# Altium PCB Digital_Watch.PcbDoc (part 1 of 2)
Units mm, origin at the board's own origin, x right, y up, seen from the top; angles counter-clockwise.
Board outline 70.45 x 70.45 mm, 4 copper layers (Top Layer, Mid Layer 1, Mid Layer 2, Bottom Layer), stack 1.583 mm thick; 72 components, 93 nets, 389 pads, 114 vias.
Unrouted connection lines stored in the file: 91.
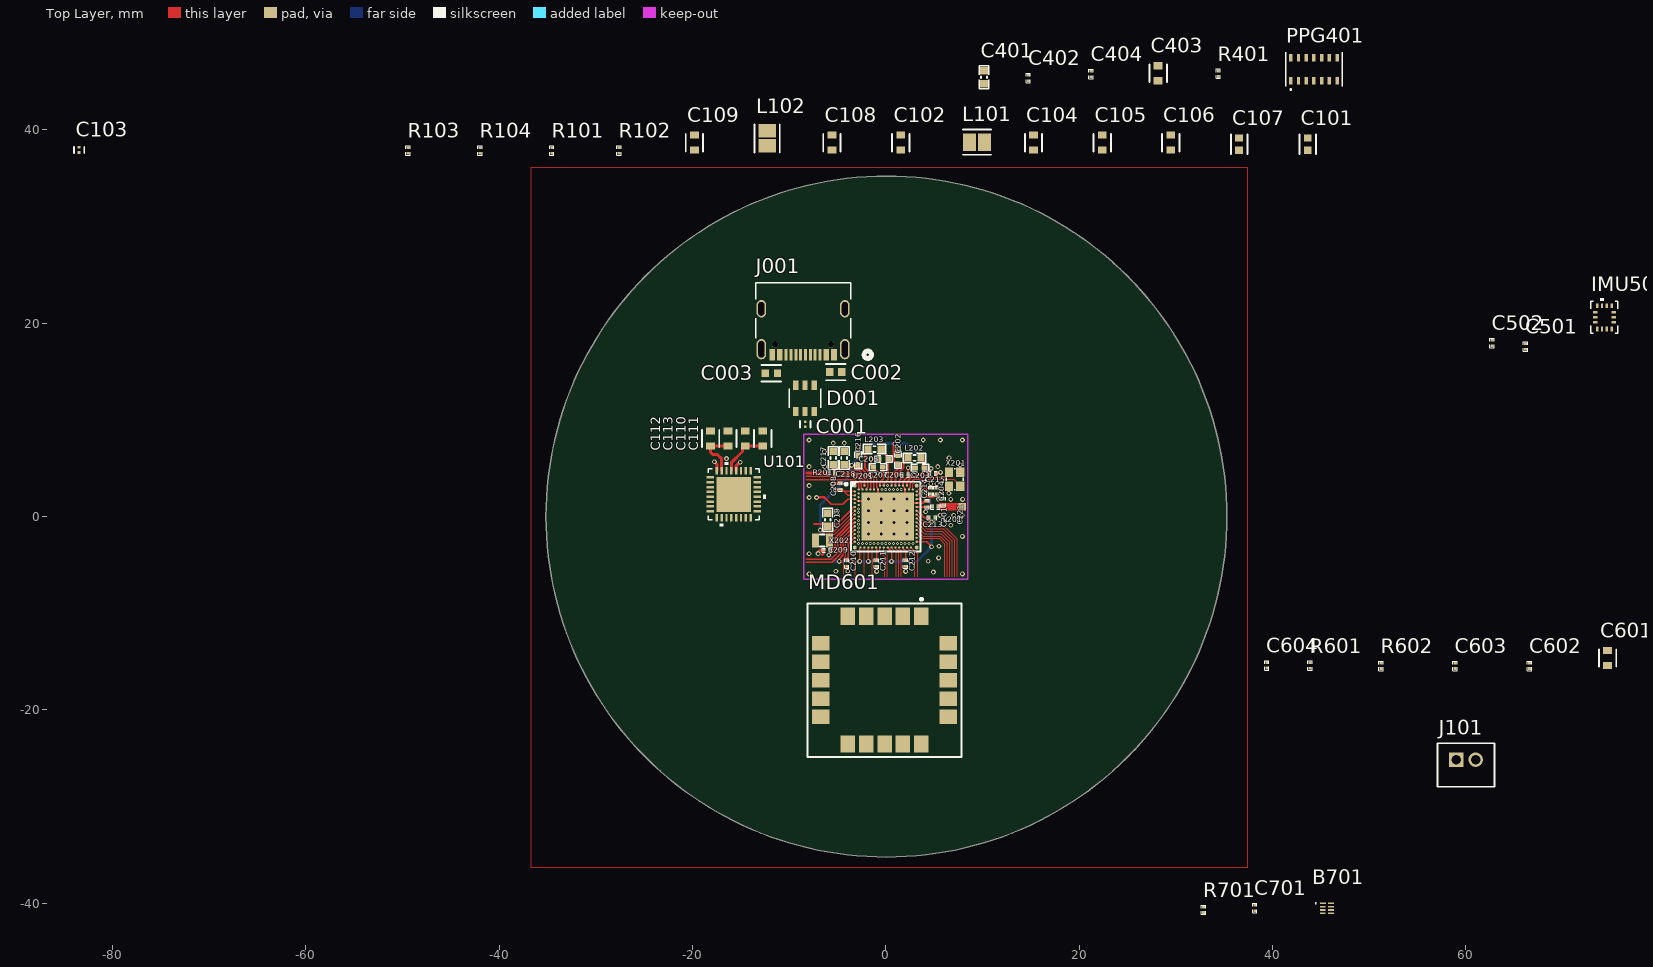
[diagram p0: Top Layer view]
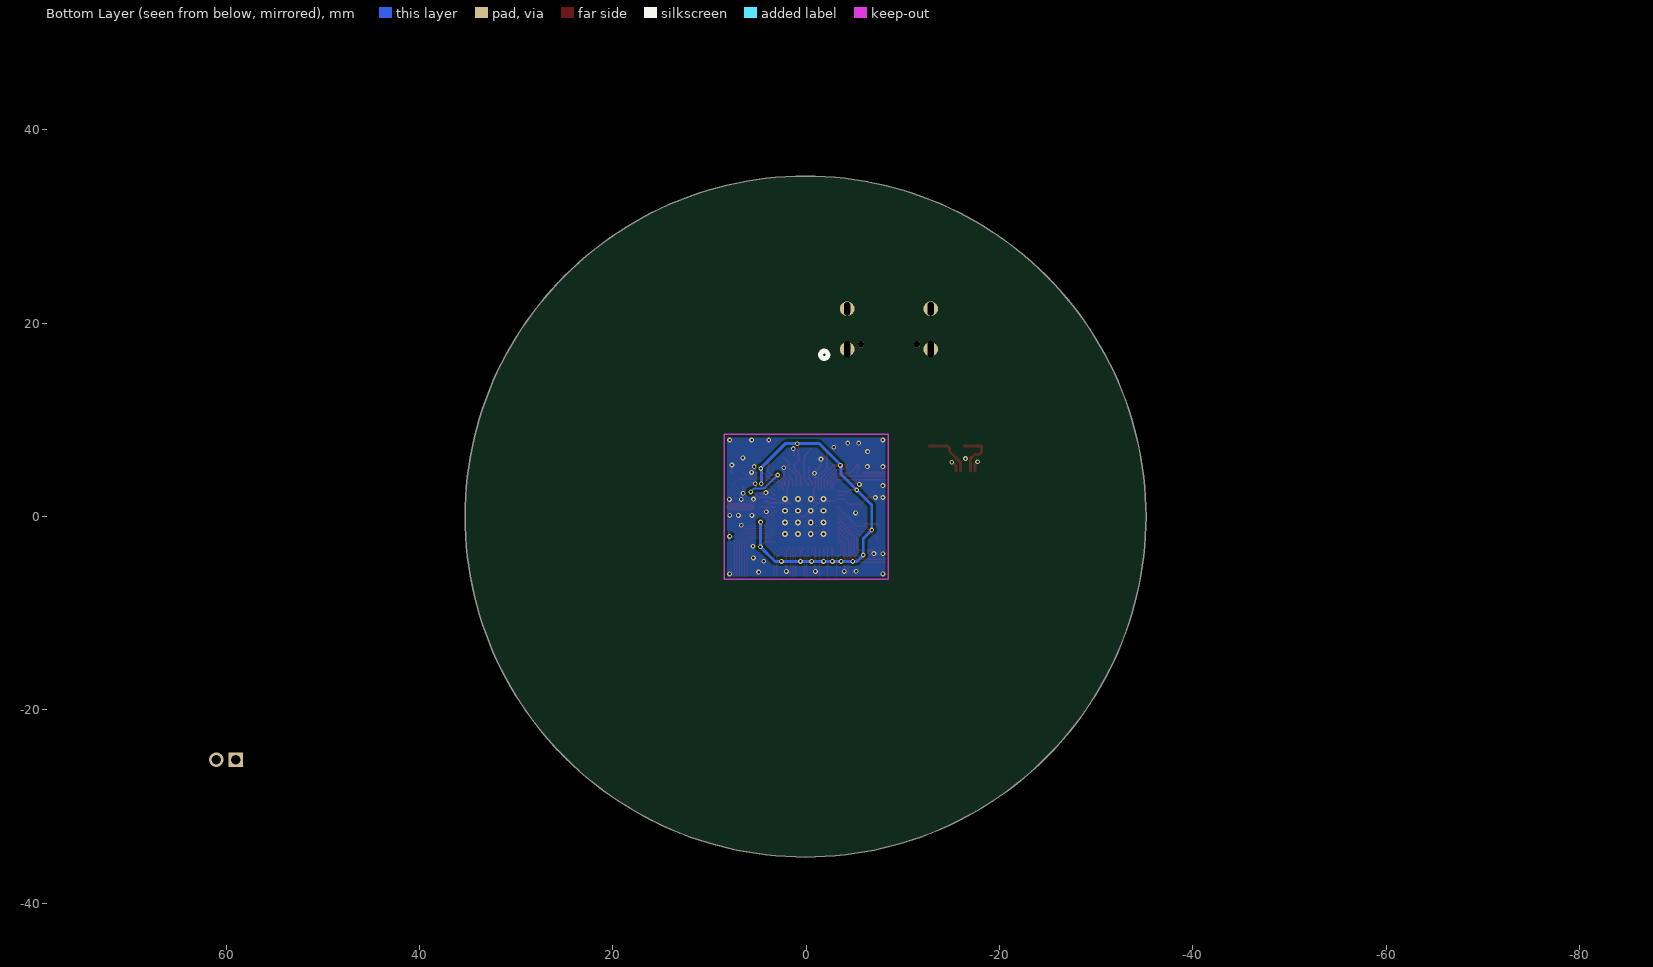
[diagram p1: Bottom Layer view, seen from below]
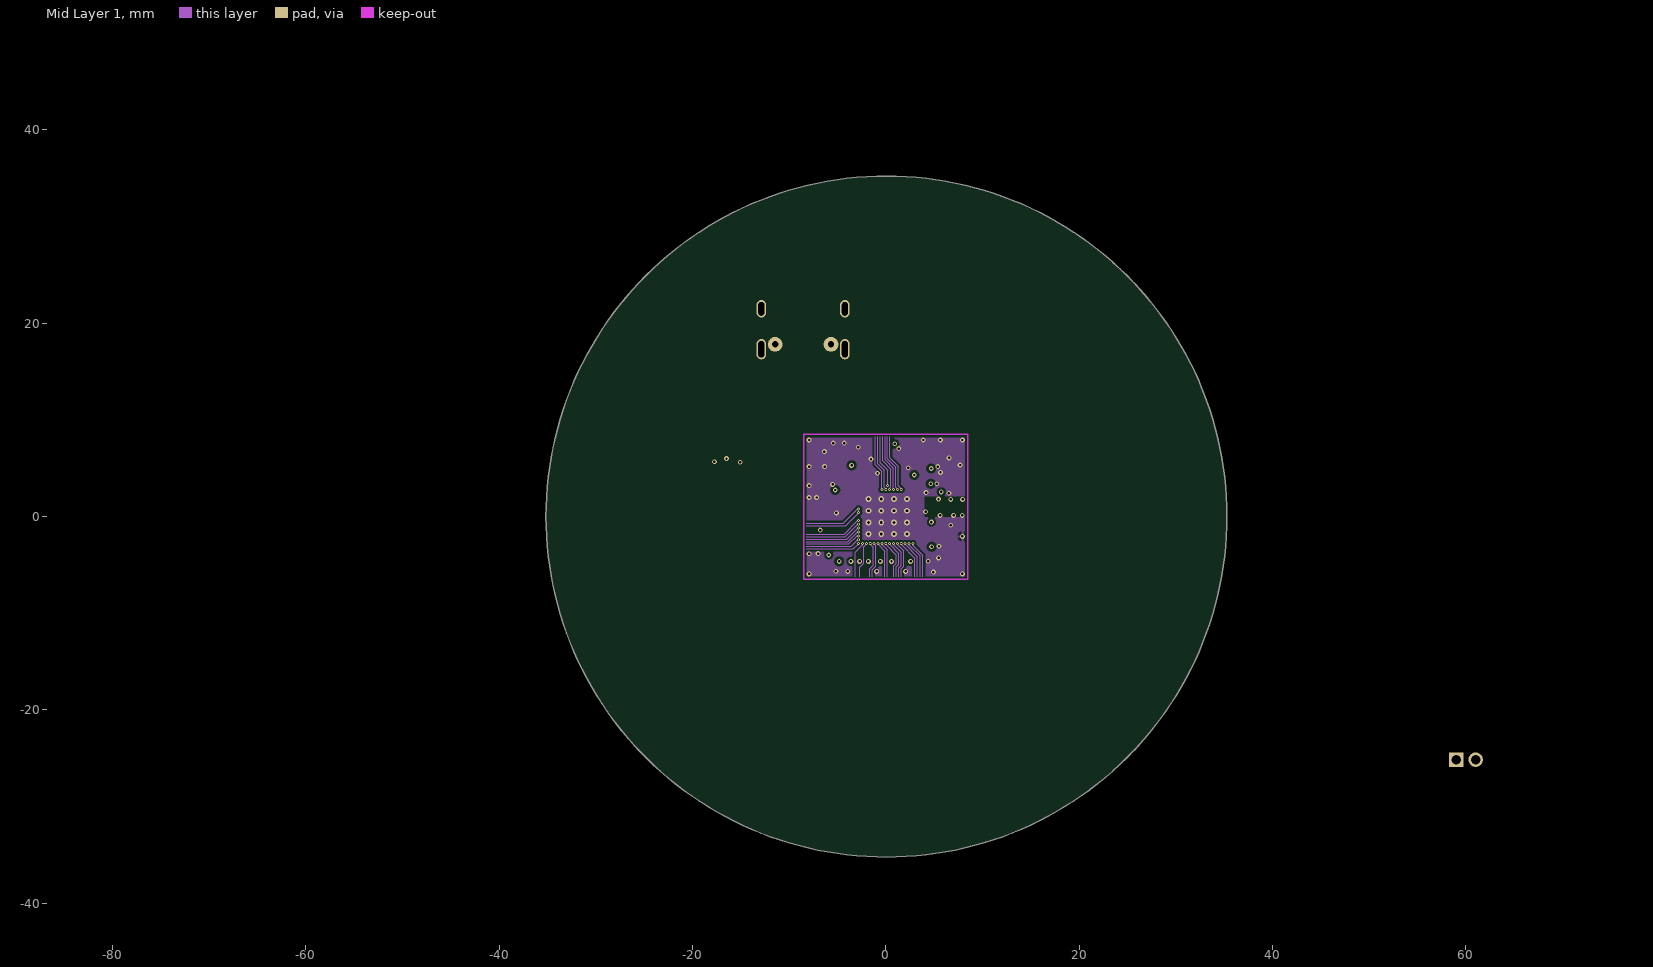
[diagram p2: Mid Layer 1]
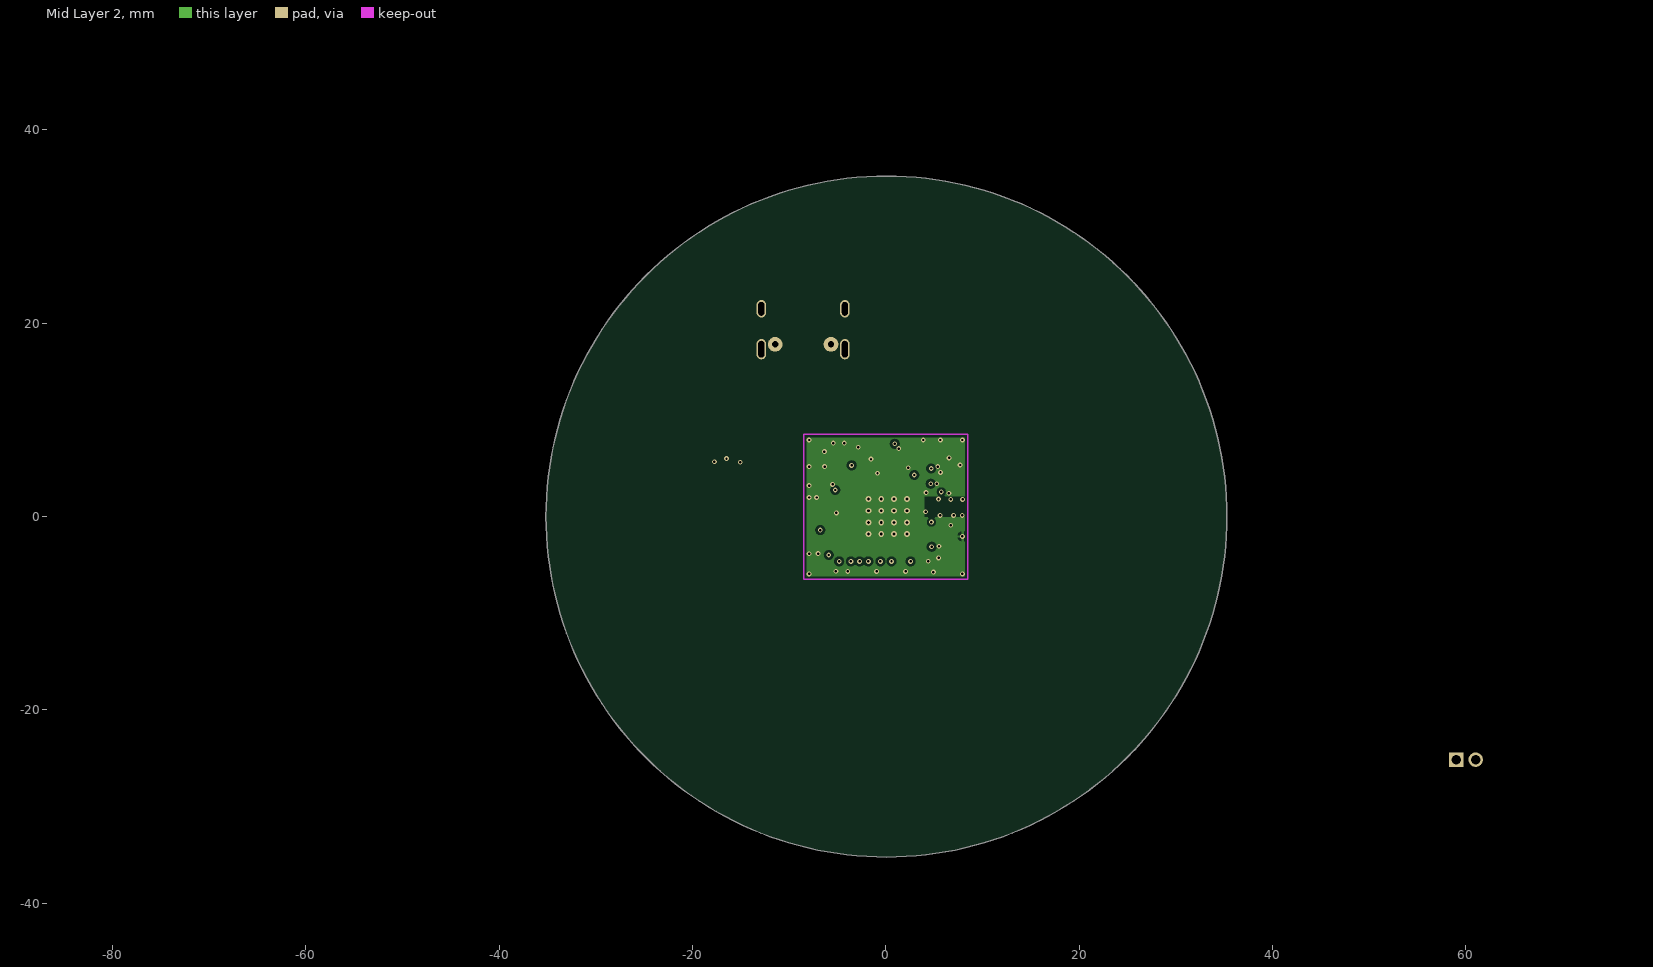
[diagram p3: Mid Layer 2]

## Layer stack, top to bottom
Top Solder: solder mask 0.0102, Solder Resist, Dk 3.5
Top Layer: signal copper 0.0356
Dielectric1: core 0.07, FR-4, Dk 4.8
Mid Layer 1: signal copper 0.036
Dielectric 3: prepreg 1.3, Dk 4.2
Mid Layer 2: signal copper 0.036
Dielectric 2: core 0.07, Dk 4.2
Bottom Layer: signal copper 0.0356
Bottom Solder: solder mask 0.0102, Solder Resist, Dk 3.5

## Board outline
0.075,-35.225 cw(c0.075,0) -35.15,0 cw(c0.075,0) 0.075,35.225 cw(c0.075,0) 35.3,0 cw(c0.075,0)

## Design rules (kind name [scope] priority, off if disabled: settings)
Clearance Clearance_microvia [AsMM(ViaDiameter) = 0.3 vs AsMM(ViaDiameter) = 0.3] p1: gap=0.1 ignorepadtopadclearanceinfootprint=FALSE
Clearance Polygon_ANT [(InNamedPolygon('Top_Layer-GND')) or  (InNamedPolygon('Mid_Layer_1-GND')) or (InNamedPolygon('Mid_Layer_2-GND')) or (InNamedPolygon('Bottom_Layer-GND')) vs InNet('RF')] p2: gap=0.127 ignorepadtopadclearanceinfootprint=FALSE except(0: Arc-Hole Track-Hole SMDPad-Hole THPad-Hole Via-Hole Fill-Hole Poly-Hole Region-Hole Text-Hole)
Clearance Polygon [(InNamedPolygon('Top_Layer-GND')) or  (InNamedPolygon('Mid_Layer_1-GND')) or (InNamedPolygon('Mid_Layer_2-GND')) or (InNamedPolygon('Bottom_Layer-GND'))] p3: gap=0.25 ignorepadtopadclearanceinfootprint=FALSE
Clearance Clearance_Top [OnTopLayer] p4: gap=0.125 ignorepadtopadclearanceinfootprint=FALSE
Clearance [All] p5: gap=0.125 ignorepadtopadclearanceinfootprint=FALSE
ComponentClearance [All] p1 off: gap=0.254 collisioncheckmode=3 verticalgap=0.254 showdistances=FALSE
DiffPairsRouting [All] p1: maxlimit=0.193 minlimit=0.193 mostfreqgap=0.193 toplayer_minwidth=0.125 toplayer_maxwidth=0.381 toplayer_prefwidth=0.165 midlayer1_minwidth=0.125 midlayer1_maxwidth=0.381 midlayer1_prefwidth=0.165 midlayer2_minwidth=0.125 midlayer2_maxwidth=0.381 midlayer2_prefwidth=0.165 bottomlayer_minwidth=0.125 bottomlayer_maxwidth=0.381 bottomlayer_prefwidth=0.165 maxuncoupledlength=12.7
FabricationTestPointUsage TestPointUsage [All] p1: valid=0 allowmultiple=FALSE
FabricationTestpoint Testpoint [All] p1: side=3 testpointundercomponent=TRUE minsize=1.016 maxsize=2.54 preferedsize=1.524 minholesize=0 maxholesize=1.016 preferedholesize=0.813 testpointgrid=0.025 allowsidetop=TRUE allowsidebottom=TRUE usegrid=TRUE gridtolerance=0
Height [All] p1 off: minheight=0 maxheight=25.4 prefheight=12.7
HoleSize [All] p1: absolutevalues=TRUE maxlimit=4.064 minlimit=0.1 maxpercent=80.000 minpercent=20.000
MinimumAnnularRing [All] p1 off: minimumring=0.152
PolygonConnect PolygonConnect_1 [isVia and innet(gnd)] p1: connectstyle=Direct reliefconductorwidth=0.254 reliefentries=4 polygonreliefangle="90 Angle" airgapwidth=0.254
PolygonConnect [All] p2: connectstyle=Relief reliefconductorwidth=0.254 reliefentries=4 polygonreliefangle="90 Angle" airgapwidth=0.254
RoutingVias [All] p1: holewidth=0.305 width=0.61 viastyle="Through Hole" minholewidth=0.1 minwidth=0.3 maxholewidth=0.305 maxwidth=0.61
SilkToSolderMaskClearance SilkscreenOverComponentPads [IsPad] p1: minsilkscreentomaskgap=0.254 clearancetoexposedcopper=TRUE
SolderMaskExpansion [All] p1: expansion=0.076 istentingtop=FALSE
SupplyNets "Schematic Supply Nets_7" [InNet('PGND')] p1: voltage=0.000
SupplyNets "Schematic Supply Nets_6" [InNet('PVSS2')] p2: voltage=0.000
SupplyNets "Schematic Supply Nets_5" [InNet('PVSS1')] p3: voltage=0.000
SupplyNets "Schematic Supply Nets_4" [InNet('GND')] p4: voltage=0.000
Width [All] p1: maxlimit=2 minlimit=0.125 preferedwidth=0.125 minimp=50.000000 maximp=50.000000 favimp=50.000000
23 further rules are at their usual default settings.

## Classes and differential pairs
component class Designator: C201 C202 C203 C204 C205 C206 C207 C208 C209 C210 C211 C212 C213 C214 C215 C216 C217 C218 C219 C221 L201 L202 L203 R201 U201 X201 X202
differential pair IN-D: +IN-D_P -IN-D_N
differential pair D: +D_P -D_N

## Components (designator, comment, footprint, x,y, rotation, side; value= is the part's Value field where it differs from the comment)
B701 "PCA9306JKZ" PCA9306JKZ 45.625,-40.525 r0 top
C001 "100 nF" FP-CC0201-BA-MFG -8.325,9.55 r270 top
C002 "1uF" FP-CL10-IPC_C -5.175,14.95 r0 top
C003 "1uF" FP-CL10-IPC_C -11.825,14.825 r180 top
C101 "1uF" FP-CL10-IPC_C 43.663,38.536 r90 top
C102 "2.2uF" FP-GRM188-0_2-MFG 1.561,38.686 r90 top
C103 "100 nF" FP-CC0201-BA-MFG -83.444,37.936 r90 top
C104 "10uF" FP-GRM188-0_2-MFG 15.286,38.686 r90 top
C105 "10uF" FP-GRM188-0_2-MFG 22.387,38.686 r90 top
C106 "10uF" FP-GRM188-0_2-MFG 29.487,38.686 r90 top
C107 "1uF" FP-CL10-IPC_C 36.562,38.536 r90 top
C108 "10uF" FP-GRM188-0_2-MFG -5.565,38.686 r90 top
C109 "10uF" FP-GRM188-0_2-MFG -19.791,38.686 r90 top
C110 "10uF" FP-GRM188-0_2-MFG -14.525,8.075 r90 top
C111 "10uF" FP-GRM188-0_2-MFG -12.725,8.075 r90 top
C112 "10uF" FP-GRM188-0_2-MFG -18.125,8.075 r90 top
C113 "10uF" FP-GRM188-0_2-MFG -16.325,8.075 r90 top
C201 "0.7pF" CAPC0603X03L_C 4.3,1.3 r270 top
C202 "1.0µF" CAPC1005X04L 1.275,5.875 r90 top
C203 "1.0µF" CAPC1005X04L 3.525,5.05 r0 top
C204 "2.2nF" CAPC0603X03L_C 5.2,2.65 r90 top
C205 "1.0µF" CAPC1005X04L -0.25,5.955 r0 top
C206 "100nF" CAPC0603X03L_C 2.019,4.3 r0 top
C207 "1.0µF" CAPC1005X04L -0.8,5.105 r0 top
C208 "100nF" CAPC0603X03L_C -4.7,3.1 r90 top
C209 "100nF" CAPC0603X03L_C -6.075,-3.475 r180 top
C210 "100nF" CAPC0603X03L_C -4.026,-4.875 r270 top
C211 "100nF" CAPC0603X03L_C -0.948,-4.875 r270 top
C212 "100nF" CAPC0603X03L_C 2.05,-4.875 r270 top
C213 "100nF" CAPC0603X03L_C 4.8,-0.125 r0 top
C214 "100nF" CAPC0603X03L_C 4.65,2.65 r270 top
C215 "100nF" CAPC0603X03L_C 4.85,4.475 r0 top
C216 "1.0µF" CAPC1005X04L -2.85,5.825 r270 top
C217 "4.7µF" CAPC1608X06L -5.425,6.055 r90 top
C218 "4.7µF" CAPC1608X06L -4.3,6.055 r90 top
C219 "2.2µF" CAPC1608X06L -6,-0.325 r90 top
C221 "N.C." CAPC0603X03L_C_NC 5.975,1.5 r270 top
C401 "4.7µF" CAPC1608X06L 10.175,45.45 r90 top
C402 "100nF" CAPC0603X03L_C 14.75,45.36 r90 top
C403 "10uF" FP-GRM188-0_2-MFG 28.175,45.85 r90 top
C404 "100nF" CAPC0603X03L_C 21.225,45.79 r90 top
C501 "100nF" CAPC0603X03L_C 66.174,17.588 r90 top
C502 "100nF" CAPC0603X03L_C 62.725,17.94 r90 top
C601 "10uF" FP-GRM188-0_2-MFG 74.676,-14.638 r90 top
C602 "100nF" CAPC0603X03L_C 66.6,-15.438 r90 top
C603 "100nF" CAPC0603X03L_C 58.9,-15.438 r90 top
C604 "100nF" CAPC0603X03L_C 39.425,-15.385 r90 top
C701 "100nF" CAPC0603X03L_C 38.175,-40.5 r90 top
D001 "USBLC6-2SC6" SOT23-6L_STM -8.35,12.235 r270 top value=2.5pF
IMU501 "BMI270" BMI270_BOS 74.349,20.613 r90 top
J001 "USB4105-GF-A" USB4105_GCT -8.55,20.225 r180 top
J101 "B2B-PH-K-S(LF)(SN)" JST-B2B-PH-K-S_V 60.025,-25.7 r0 top
L101 "2.2uH" FP-MLP2016M-IPC_B 9.461,38.736 r0 top
L102 "2.2uH" FP-MLP2016M-IPC_B -12.265,39.136 r90 top
L201 "2.2nH" INDC0603X03L_C 5.125,1 r180 top
L202 "10µH" INDC1608X06L 2.975,6.075 r180 top
L203 "10µH" INDC1608X06L -1.15,6.975 r180 top
MD601 "SAM-M10Q-00B" FP-SAM-M10Q-00B-MFG -0.125,-16.925 r270 top
PPG401 "MAX30102EFD+T" 21-1048_F143A5+1_MXM 44.3,46.275 r90 top
R101 "47k" RESC0603X03L_C -34.541,37.886 r90 top
R102 "150k" RESC0603X03L_C -27.591,37.886 r90 top
R103 "3.3k" RESC0603X03L_C -49.417,37.886 r90 top
R104 "3.3k" RESC0603X03L_C -41.967,37.886 r90 top
R201 "2R2" RESC0603X03L_C -5.6,4.525 r0 top
R401 "1k" RESC0603X03L_C 34.4,45.815 r90 top
R601 "4.7k" RESC0603X03L_C 43.9,-15.425 r90 top
R602 "4.7k" RESC0603X03L_C 51.224,-15.438 r90 top
R701 "200k" RESC0603X03L_C 32.875,-40.675 r90 top
U101 "nPM1300-QEAA" QFN32_5X5_NOR -15.725,2.3 r0 top
U201 "nRF5340-QKAA" AQFN40P700X700X85_HS-99N 0,0 r0 top locked
X201 "32MHz" BT-XTAL_2016 7.125,3.854 r90 top
X202 "32.768kHz" XTAL_2012 -6.55,-2.475 r0 top

## Footprints (in the part's own frame and the unit in brackets; to place one, negate y for a bottom-side part, rotate by r counter-clockwise, add the part's x,y. Pads: shape width x height; smd on the part's side, far side on the other; paste and mask are expansions set on the pad)
21-1048_F143A5+1_MXM [mil]
  rect 30x14 smd paste+0 mask+0: 1(-47,94.49) 2(-47,62.99) 3(-47,31.5) 4(-47,0) 5(-47,-31.5) 6(-47,-62.99) 7(-47,-94.49) 8(47,-94.49) 9(47,-62.99) 10(47,-31.5) 11(47,0) 12(47,31.5) 13(47,62.99) 14(47,94.49)
  silkscreen extent -85,-115 70,115, body extent -65,-110 65,110, height 65
AQFN40P700X700X85_HS-99N [mm] "AQFN, 98-Leads, Body 7.00x7.00mm, Pitch 0.40mm, Thermal Pad 5.4x5.0mm, IPC Medium Density"
  rect 5.4x5 smd paste-5: 104(0.2,0)
  round 0.4 smd paste+0.012: A1(-3.2,3.2) A31(3.2,3.2) AL1(-3.2,-3.2) AL31(3.2,-3.2)
  round 0.225 smd paste+0.012: A5(-2.2,3.2) A13(-0.6,3.2) A15(-0.2,3.2) A17(0.2,3.2) A19(0.6,3.2) A21(1,3.2) A23(1.4,3.2) A25(1.8,3.2) A27(2.2,3.2) AA1(-3.2,-1) AA31(3.2,-1) AB2(-2.8,-1.2) AC1(-3.2,-1.4) AC31(3.2,-1.4) AD2(-2.8,-1.6) AE1(-3.2,-1.8) AE31(3.2,-1.8) AF2(-2.8,-2) AG1(-3.2,-2.2) AG31(3.2,-2.2) AH2(-2.8,-2.4) AJ1(-3.2,-2.6) AJ31(3.2,-2.6) AK2(-2.8,-2.8) AK4(-2.4,-2.8) AK6(-2,-2.8) AK8(-1.6,-2.8) AK10(-1.2,-2.8) AK12(-0.8,-2.8) AK14(-0.4,-2.8) AK16(0,-2.8) AK18(0.4,-2.8) AK20(0.8,-2.8) AK22(1.2,-2.8) AK24(1.6,-2.8) AK26(2,-2.8) AK28(2.4,-2.8) AK30(2.8,-2.8) AL3(-2.6,-3.2) AL5(-2.2,-3.2) AL7(-1.8,-3.2) AL9(-1.4,-3.2) AL11(-1,-3.2) AL13(-0.6,-3.2) AL15(-0.2,-3.2) AL17(0.2,-3.2) AL19(0.6,-3.2) AL21(1,-3.2) AL23(1.4,-3.2) AL25(1.8,-3.2) AL27(2.2,-3.2) AL29(2.6,-3.2) B2(-2.8,2.8) B4(-2.4,2.8) B6(-2,2.8) B8(-1.6,2.8) B10(-1.2,2.8) B12(-0.8,2.8) B14(-0.4,2.8) B16(0,2.8) B18(0.4,2.8) B20(0.8,2.8) B22(1.2,2.8) B24(1.6,2.8) B26(2,2.8) B28(2.4,2.8) B30(2.8,2.8) C1(-3.2,2.6) C31(3.2,2.6) D2(-2.8,2.4) E1(-3.2,2.2) E31(3.2,2.2) F2(-2.8,2) G1(-3.2,1.8) G31(3.2,1.8) H2(-2.8,1.6) J1(-3.2,1.4) J31(3.2,1.4) K2(-2.8,1.2) L1(-3.2,1) L31(3.2,1) M2(-2.8,0.8) N1(-3.2,0.6) N31(3.2,0.6) P2(-2.8,0.4) R1(-3.2,0.2) R31(3.2,0.2) T2(-2.8,0) U1(-3.2,-0.2) U31(3.2,-0.2) V2(-2.8,-0.4) W1(-3.2,-0.6) W31(3.2,-0.6) Y2(-2.8,-0.8)
  rrect15% 1.1x1 on Top Paste: ""(-1.75,-1.8) ""(-1.75,-0.6) ""(-1.75,0.6) ""(-1.75,1.8) ""(-0.45,-1.8) ""(-0.45,-0.6) ""(-0.45,0.6) ""(-0.45,1.8) ""(0.85,-1.8) ""(0.85,-0.6) ""(0.85,0.6) ""(0.85,1.8) ""(2.15,-1.8) ""(2.15,-0.6) ""(2.15,0.6) ""(2.15,1.8)
  silkscreen extent -4.22,-3.6 3.6,3.6, body extent -3.5,-3.5 3.5,3.5, height 0.85
BMI270_BOS [mil]
  rect 19x10 smd paste+0 mask+0: 1(-47.5,29.53) 2(-47.5,9.84) 3(-47.5,-9.84) 4(-47.5,-29.53) 8(47.5,-29.53) 9(47.5,-9.84) 10(47.5,9.84) 11(47.5,29.53)
  rect 10x19 smd paste+0 mask+0: 5(-19.69,-37.5) 6(0,-37.5) 7(19.68,-37.5) 12(19.68,37.5) 13(0,37.5) 14(-19.69,37.5)
  silkscreen extent -65,-55 77,55, body extent -60,-50 60,50, height 34
BT-XTAL_2016 [mm]
  rect 0.95x0.85 smd: 1(-0.725,-0.575) 2(0.725,-0.575) 3(0.725,0.575) 4(-0.725,0.575)
  silkscreen extent -1.08,-0.88 1.08,0.88, body extent -1.05,-0.85 1.05,0.85, height 0.56
CAPC0603X03L_C [mm]
  rect 0.27x0.3 smd: 1(-0.285,0) 2(0.285,0)
  silkscreen extent -0.49,-0.22 0.49,0.22, body extent -0.3,-0.15 0.31,0.15, height 0.3
CAPC0603X03L_C_NC [mm]
  rect 0.27x0.3 smd mask+0.05: 1(-0.285,0) 2(0.285,0)
  silkscreen extent -0.49,-0.22 0.49,0.22
CAPC1005X04L [mm]
  rect 0.6x0.5 smd: 1(-0.5,0) 2(0.5,0)
  silkscreen extent -0.9,-0.35 0.9,0.35, body extent -0.51,-0.25 0.51,0.25, height 0.5
CAPC1608X06L [mm]
  rect 0.75x0.8 smd: 1(-0.675,0) 2(0.675,0)
  silkscreen extent -1.17,-0.5 1.17,0.5, body extent -0.8,-0.43 0.8,0.43, height 0.8
FP-CC0201-BA-MFG [mm]
  rect 0.28x0.3 smd paste+0 mask+0: 1(-0.265,0) 2(0.265,0)
  silkscreen extent -0.32,-0.53 0.32,0.53, body extent -0.51,-0.27 0.51,0.27, height 0.25
FP-CL10-IPC_C [mm]
  rect 0.758x0.812 smd paste+0 mask+0: 1(-0.627,0) 2(0.627,0)
  silkscreen extent -1.01,-0.85 1.01,0.85, body extent -1.11,-0.55 1.11,0.55, height 0.25
FP-GRM188-0_2-MFG [mm]
  rect 0.75x0.9 smd paste+0 mask+0: 1(-0.775,0) 2(0.775,0)
  silkscreen extent -0.9,-0.9 0.9,0.9, body extent -1.25,-0.6 1.25,0.6, height 0.25
FP-MLP2016M-IPC_B [mm]
  rect 1.354x1.806 smd paste+0 mask+0: 1(-0.776,0) 2(0.776,0)
  silkscreen extent -1.45,-1.3 1.45,1.3, body extent -1.7,-1.15 1.7,1.15, height 0.25
FP-SAM-M10Q-00B-MFG [mm]
  rect 1.8x1.5 smd paste+0 mask+0: 1(-6.6,3.8) 2(-6.6,1.9) 3(-6.6,0) 4(-6.6,-1.9) 5(-6.6,-3.8) 11(6.6,-3.8) 12(6.6,-1.9) 13(6.6,0) 14(6.6,1.9) 15(6.6,3.8)
  rect 1.5x1.8 smd paste+0 mask+0: 6(-3.8,-6.6) 7(-1.9,-6.6) 8(0,-6.6) 9(1.9,-6.6) 10(3.8,-6.6) 16(3.8,6.6) 17(1.9,6.6) 18(0,6.6) 19(-1.9,6.6) 20(-3.8,6.6)
  silkscreen extent -8.5,-7.95 7.95,7.95, body extent -8.05,-8.05 8.05,8.05, height 0.25
INDC0603X03L_C [mm]
  rect 0.27x0.3 smd: 1(-0.285,0) 2(0.285,0)
  silkscreen extent -0.49,-0.22 0.49,0.22, body extent -0.31,-0.16 0.31,0.16, height 0.26
INDC1608X06L [mm]
  rect 0.75x0.8 smd: 1(-0.675,0) 2(0.675,0)
  silkscreen extent -1.17,-0.5 1.17,0.5, body extent -0.8,-0.48 0.8,0.48, height 0.8
JST-B2B-PH-K-S_V [mm] "Connector, 2-Leads, Body 5.9x4.5mm, Pitch 2mm"
  rect 1.5x1.5 hole 1: 1(-1,0.55)
  round 1.5 hole 1: 2(1,0.55)
  silkscreen extent -2.95,-2.25 2.95,2.25, body extent -2.95,-2.25 2.95,2.25, height 6
PCA9306JKZ [mm]
  rect 0.65x0.17 smd: 1(-0.4,0.525)
  rect 0.6x0.17 smd: 2(-0.425,0.175) 3(-0.425,-0.175) 4(-0.425,-0.525) 5(0.425,-0.525) 6(0.425,-0.175) 7(0.425,0.175) 8(0.425,0.525)
  silkscreen extent -1.2,0.48 -1.1,0.57
QFN32_5X5_NOR [mil]
  rect 30x10 smd paste+0 mask+0: 1(-95.5,68.9) 2(-95.5,49.21) 3(-95.5,29.53) 4(-95.5,9.84) 5(-95.5,-9.84) 6(-95.5,-29.53) 7(-95.5,-49.21) 8(-95.5,-68.9) 17(95.5,-68.9) 18(95.5,-49.21) 19(95.5,-29.53) 20(95.5,-9.84) 21(95.5,9.84) 22(95.5,29.53) 23(95.5,49.21) 24(95.5,68.9)
  rect 10x30 smd paste+0 mask+0: 9(-68.9,-95.5) 10(-49.21,-95.5) 11(-29.53,-95.5) 12(-9.84,-95.5) 13(9.84,-95.5) 14(29.53,-95.5) 15(49.21,-95.5) 16(68.9,-95.5) 25(68.9,95.5) 26(49.21,95.5) 27(29.53,95.5) 28(9.84,95.5) 29(-9.84,95.5) 30(-29.53,95.5) 31(-49.21,95.5) 32(-68.9,95.5)
  rect 142x142 smd paste-71 mask+0: 33(0,0)
  silkscreen extent -104,-130 130,130, body extent -99,-99 99,99, height 35
RESC0603X03L_C [mm]
  rect 0.27x0.3 smd: 1(-0.285,0) 2(0.285,0)
  silkscreen extent -0.49,-0.22 0.49,0.22, body extent -0.3,-0.15 0.3,0.15, height 0.23
SOT23-6L_STM [mil]
  rect 38.5x22 smd paste+0 mask+0: 1(-53.75,37.4) 2(-53.75,0) 3(-53.75,-37.4) 4(53.75,-37.4) 5(53.75,0) 6(53.75,37.4)
  silkscreen extent -40,-65 40,65, body extent -59,-60 59,60, height 57
USB4105_GCT [mil]
  oval 39x71 / inner oval 39x71 / far side round 60 hole 55 slot 24 at 0 deg paste-99999 mask-35.5: 13(-170.08,-49.97) 14(170.08,-49.97)
  oval 39x83 / inner oval 39x83 / far side round 60 hole 67 slot 24 at 0 deg paste-99999 mask-41.5: 15(-170.08,114.6) 16(170.08,114.6)
  round 26 / inner round 60 / far side round 26 hole 26 unplated paste-99999 mask+0: 17(-113.78,94.91) 18(113.78,94.91)
  rect 23x45 smd paste-22.5 mask-22.5: A1-B12(-125.98,137.24) A4-B9(-94.49,137.24) B1-A12(125.98,137.24) B4-A9(94.49,137.24)
  rect 12x45 smd paste+0 mask+0: A5(-49.21,137.24) A6(-9.84,137.24) A7(9.84,137.24) A8(49.21,137.24) B5(68.9,137.24) B6(29.53,137.24) B7(-29.53,137.24) B8(-68.9,137.24)
  silkscreen extent -278,-157 194,152
XTAL_2012 [mm]
  rect 0.75x1.4 smd: 1(-0.725,0) 2(0.725,0)
  silkscreen extent -0.24,-0.6 0.24,0.6, body extent -1,-0.61 1,0.61, height 0.6

## Part data
B701: "Dual Supply bidirectional I2C-bus and SMBus voltage-level translator", Manufacturer="NXP Semiconductors", Max Operating Temperature=105°C, Max Supply Voltage=3.6V, Min Operating Temperature=-40°C, Min Supply Voltage=0V, Nominal Supply Voltage (DC)=1.2V, Supplier Part Number 1=568-PCA9306JKZCT-ND, Category="Voltage Level Shifters", China RoHS=Compliant, ComponentLink1Description=https://datasheet.octopart.com:443/PCA9306JKZ-NXP-Semiconductors-datasheet-180940845.pdf?src-supplier=IHS, ComponentLink1URL=https://datasheet.octopart.com:443/PCA9306JKZ-NXP-Semiconductors-datasheet-180940845.pdf?src-supplier=IHS, ComponentLink2Description=https://datasheet.octopart.com:443/PCA9306JKZ-NXP-Semiconductors-datasheet-24570114.pdf?src-supplier=Future+Electronics, ComponentLink2URL=https://datasheet.octopart.com:443/PCA9306JKZ-NXP-Semiconductors-datasheet-24570114.pdf?src-supplier=Future+Electronics, ComponentLink3Description=http://sigma.octopart.com:80/reach_statement/NXP-Semiconductors-company-13.pdf?src-supplier=Compliance+Statements, ComponentLink3URL=http://sigma.octopart.com:80/reach_statement/NXP-Semiconductors-company-13.pdf?src-supplier=Compliance+Statements, ComponentLink4Description=http://sigma.octopart.com:80/rohs_statement/NXP-Semiconductors-company-12.pdf?src-supplier=Compliance+Statements, ComponentLink4URL=http://sigma.octopart.com:80/rohs_statement/NXP-Semiconductors-company-12.pdf?src-supplier=Compliance+Statements, Height - Seated (Max)=500µm, Length=1.35mm, Lifecycle Status=Production, Manufacturer Part Number=PCA9306JKZ, Number of Bits=1, Number of Circuits=1, Number of Terminals=8, Pricing="6000=0.3053, 12000=0.2988, 18000=0.2948 (USD)", Propagation Delay=3.3ns, REACH SVHC=Yes, RoHS=Compliant, Stock=18000, Supplier="Arrow Electronics", Supplier 1=DigiKey, Supplier Part Number=PCA9306JKZ, Terminal Pitch=350µm, Width=1mm
C001 C103: library part CMP-03422-001239-1, "CAP CER 0.1UF 16V X5R 0201", Manufacturer=Yageo, Manufacturer Part Number=CC0201KRX5R7BB104, Package=CC0201-BA, Temperature="-55°C to +85°C", Temperature Characteristic=X5R, Temperature Coefficient=15%, Temperature Range High=+85°C, Temperature Range Low=-55°C, Tolerance=0.1, Voltage Rating="16 V", Automotive=No, Capacitance="100 nF", Category=Cap, ComponentLink2Description=Datasheet, ComponentLink2URL=http://www.yageo.com/documents/recent/UPY-GPHC_X5R_4V-to-50V_25.pdf, Device Class L1="Passive Components", Device Class L2=Capacitors, Device Class L3="Ceramic Capacitors", Digikey Description="CAP CER 0.1UF 16V X5R 0201", Footprint Url=http://www.yageo.com/exep/pages/download/literatures/UPY-C_GEN_24.pdf, Height=0.33mm, Ipc Land Pattern Name=CAPC6030X30, Lead Free=Yes, Material=Ceramic, Mouser Description="Multilayer Ceramic Capacitors MLCC - SMD/SMT 100K nF X5R 10% 16 Volts", Octopart=https://octopart.com/cc0201krx5r7bb104-yageo-57080722, RoHS=TRUE
C002 C003 C101 C107: library part CMP-13271-002233-1, "Cap Ceramic 1uF 10V X5R ±10% Pad SMD 0603 +85°C T/R", Case/Package=0603, Dielectric=X5R, Max Operating Temperature=85°C, Min Operating Temperature=-55°C, Package Quantity=10000, Tolerance=10%, Voltage=10V, Capacitance=1uF, Depth=0.8mm, Height=0.8mm, Lead Free="Lead Free", Length=1.6mm, Mount="Surface Mount", Packaging="Tape and Reel", Radiation Hardening=No, Thickness=0.035inch, Voltage Rating=10V, Voltage Rating (DC)=10V, Width=0.031inch
C102: library part CMP-06035-057307-1, "Chip Multilayer Ceramic Capacitors for General Purpose, 0603, 2.2uF, X7R, 15%, 10%, 16V", Case/Package=0603
C104 C105 C106 C108 C109 C110 C111 C112 C113 C403 C601: library part CMP-2006-02520-2, "Chip Multilayer Ceramic Capacitors for General Purpose, 0603, 10uF, X5R, 15%, 20%, 25V", Case Code (Imperial)=0603, Case Code (Metric)=1608, Dielectric=X5R, Max Operating Temperature=85°C, Min Operating Temperature=-55°C, Package Quantity=1, Resistor Type=Ceramic, Tolerance=20%, Voltage=25V, Capacitance=10uF, Case/Package=0603, Depth=0.8mm, Height=0.8mm, Lead Free="Lead Free", Length=1.6mm, Mount="Surface Mount", Number of Pins=2, Packaging="Tape and Reel", REACH SVHC="No SVHC", Termination=SMD/SMT, Thickness=0.031inch, Voltage Rating=25V, Voltage Rating (DC)=25V, Weight=0.000222oz, Width=0.031inch
C201: library part C0201-0.7p, "Capacitor, NP0, ±0.05pF", Author=rsk, Component Class=Capacitors, Footprint Doc=0201, Pad Count=2
C202 C203 C205 C207 C216: library part C0402-1µ0-10V-X7S-GRM155C71A105KE11, "Capacitor, X7S, ±10%", Author=prbu, Component Class=Capacitors, Footprint Doc=0402, Pad Count=2
C204: library part C0201-2n2, "Capacitor, X7R, ±10%", Author=rsk, Component Class=Capacitors, Footprint Doc=0201, Pad Count=2
C206 C208 C209 C210 C211 C212 C213 C214 C215 C402 C404 C501 C502 C602 C603 C604 C701: library part C0201-100n-16V-X7S, "Capacitor, X7S, ±10%", Author=rsk, Component Class=Capacitors, Footprint Doc=0201, Pad Count=2
C217 C401: library part C0603-4µ7-10V-X7S, "Capacitor, X7S, ±10%", Author=rsk, Component Class=Capacitors, Footprint Doc=0603, Pad Count=2
C218: library part C0603-4µ7-6.3V-X7R, "Capacitor, X7R, ±10%", Author=rsk, Component Class=Capacitors, Footprint Doc=0603, Pad Count=2
C219: library part C0603-2µ2-6.3V-X7R, "Capacitor, X7R, ±10%", Author=rsk, Component Class=Capacitors, Footprint Doc=0603, Pad Count=2
C221: library part C0201-N.C., "Not mounted", Assembly="Not mounted", Author=rsk, Component Class=Capacitors, Footprint Doc=0201, Pad Count=2
D001: "5A 17V 6V Unidirectional 5.25V SOT-23-6 ESD and Surge Protection (TVS/ESD) ROHS", Breakdown Voltage=6V, Case/Package=SOT-23, Clamping Voltage=17V, Forward Voltage=1.1V, Leakage Current=150nA, Manufacturer=STMicroelectronics, Max Junction Temperature (Tj)=125°C, Max Repetitive Reverse Voltage (Vrrm)=5.25V, Min Operating Temperature=-40°C, Peak Pulse Current=5A, Power Line Protection=Yes, Reverse Standoff Voltage=5V, Test Current=1mA, Category="TVS Diodes", China RoHS=Compliant, ComponentLink1Description=https://datasheet.octopart.com:443/USBLC6-2SC6-STMicroelectronics-datasheet-10412581.pdf?src-supplier=Newark, ComponentLink1URL=https://datasheet.octopart.com:443/USBLC6-2SC6-STMicroelectronics-datasheet-10412581.pdf?src-supplier=Newark, ComponentLink2Description=https://datasheet.octopart.com:443/USBLC6-2SC6-STMicroelectronics-datasheet-181961833.pdf?src-supplier=Newark, ComponentLink2URL=https://datasheet.octopart.com:443/USBLC6-2SC6-STMicroelectronics-datasheet-181961833.pdf?src-supplier=Newark, ComponentLink3Description=https://datasheet.octopart.com:443/USBLC6-2SC6-STMicroelectronics-datasheet-525477.pdf?src-supplier=Factory+Futures, ComponentLink3URL=https://datasheet.octopart.com:443/USBLC6-2SC6-STMicroelectronics-datasheet-525477.pdf?src-supplier=Factory+Futures, ComponentLink4Description=https://datasheet.octopart.com:443/USBLC6-2SC6-STMicroelectronics-datasheet-82998616.pdf?src-supplier=Farnell, ComponentLink4URL=https://datasheet.octopart.com:443/USBLC6-2SC6-STMicroelectronics-datasheet-82998616.pdf?src-supplier=Farnell, ComponentLink5Description=https://datasheet.octopart.com:443/USBLC6-2SC6-STMicroelectronics-datasheet-46285.pdf?src-supplier=Farnell, ComponentLink5URL=https://datasheet.octopart.com:443/USBLC6-2SC6-STMicroelectronics-datasheet-46285.pdf?src-supplier=Farnell, ComponentLink6Description=https://datasheet.octopart.com:443/USBLC6-2SC6-STMicroelectronics-datasheet-14050643.pdf?src-supplier=iiiC, ComponentLink6URL=https://datasheet.octopart.com:443/USBLC6-2SC6-STMicroelectronics-datasheet-14050643.pdf?src-supplier=iiiC, ComponentLink7Description=https://datasheet.octopart.com:443/USBLC6-2SC6-STMicroelectronics-datasheet-10521292.pdf?src-supplier=Jameco, ComponentLink7URL=https://datasheet.octopart.com:443/USBLC6-2SC6-STMicroelectronics-datasheet-10521292.pdf?src-supplier=Jameco, Contact Plating=Tin, Country of Origin="Mainland China", Data Rate=480Mbps, Depth=1.75mm, Direction=Unidirectional, Element Configuration=Dual, ESD Protection=Yes, Export Control Classification Number (ECCN) Code=EAR99, Harmonized Tariff Schedule (HTS) Code=8541.10.00.50, Height=1.45mm, Introduction Date=2005-03-15, Lead Free="Lead Free", Length=3.05mm, Lifecycle Status=Production, Manufacturer Part Number=USBLC6-2SC6, Max Breakdown Voltage=6V, Max Operating Temperature=125°C, Max Reverse Leakage Current=150nA, Min Breakdown Voltage=6V, Mounting Technology="Surface Mount", Number of Bidirectional Channels=2, Number of Channels=2, Number of Elements=1, Number of Terminals=6, Operating Supply Voltage=1.1V, Peak Reverse Current=150nA, Pins=6, Polarity=Unidirectional, Pricing="3000=0.0806, 6000=0.0793, 12000=0.078, 15000=0.0776, 45000=0.075 (USD)", Radiation Hardening=No, REACH SVHC=Yes, Reverse Breakdown Voltage=6V, RoHS=Compliant, Schedule B="8536300000, 8536300000|8536300000|8536300000|8536300000|8536300000|8536300000|8536300000|8536300000|8536300000|8536300000|8536300000|8536300000|8536300000|8536300000|8536300000|8536300000|8536300000|8536300000|8536300000|8536300000|8536300000|8536300000|8536300000|85", Stock=120000, Supplier="Future Electronics", Supplier Part Number=USBLC6-2SC6, Termination=SMD/SMT, Width=1.75mm, Working Voltage=5V
IMU501: "Inertial Measurement Unit Digital Output 1.8V/2.5V/3.3V Automotive 14-Pin LGA", Manufacturer="Bosch Tools", Supplier Part Number=828-1091-1-ND, Category=Sensors, ComponentLink1Description=https://datasheet.octopart.com:443/BMI270-Bosch-Tools-datasheet-181206537.pdf?src-supplier=IHS, ComponentLink1URL=https://datasheet.octopart.com:443/BMI270-Bosch-Tools-datasheet-181206537.pdf?src-supplier=IHS, ComponentLink2Description=https://datasheet.octopart.com:443/BMI270-Bosch-Tools-datasheet-136061757.pdf?src-supplier=Future+Electronics, ComponentLink2URL=https://datasheet.octopart.com:443/BMI270-Bosch-Tools-datasheet-136061757.pdf?src-supplier=Future+Electronics, Export Control Classification Number (ECCN) Code=EAR99, Introduction Date=2019-05-31, Lifecycle Status=Production, Manufacturer Part Number=BMI270, Pricing="1=4.23, 5=3.788, 10=3.624, 25=3.428, 50=3.2942, 100=3.1715, 500=2.92464, 1000=2.8327 (USD)", REACH SVHC=Yes, RoHS=Compliant, Stock=35722, Supplier=DigiKey
J001: "USB Connector, 24 Contact(s), Female, Right Angle, Solder Terminal, Locking, Receptacle", Contact Resistance=50mΩ, Current Rating=6.25A, Dielectric Material="Liquid Crystal Polymer", Insulation Color=Black, Insulation Resistance=100MΩ, Manufacturer="Global Connector Technology", Max Operating Temperature=85°C, Min Operating Temperature=-40°C, Supplier Part Number=2073-USB4105-GF-ACT-ND, Voltage Rating=20V, Category="USB Connectors", China RoHS=Compliant, ComponentLink1Description=https://datasheet.octopart.com:443/USB4105-GF-A-GCT-datasheet-166929323.pdf?src-supplier=SOS+electronic, ComponentLink1URL=https://datasheet.octopart.com:443/USB4105-GF-A-GCT-datasheet-166929323.pdf?src-supplier=SOS+electronic, ComponentLink2Description=https://datasheet.octopart.com:443/USB4105-GF-A-GCT-datasheet-188935996.pdf?src-supplier=TME, ComponentLink2URL=https://datasheet.octopart.com:443/USB4105-GF-A-GCT-datasheet-188935996.pdf?src-supplier=TME, ComponentLink3Description=https://datasheet.octopart.com:443/USB4105-GF-A-GCT-datasheet-188869076.pdf?src-supplier=TME, ComponentLink3URL=https://datasheet.octopart.com:443/USB4105-GF-A-GCT-datasheet-188869076.pdf?src-supplier=TME, ComponentLink4Description=https://datasheet.octopart.com:443/USB4105-GF-A-GCT-datasheet-166927665.pdf?src-supplier=TME, ComponentLink4URL=https://datasheet.octopart.com:443/USB4105-GF-A-GCT-datasheet-166927665.pdf?src-supplier=TME, Contact Material="Gold, Nickel", Country of Origin="Mainland China", Export Control Classification Number (ECCN) Code=EAR99, Gender=Female, Harmonized Tariff Schedule (HTS) Code=8536.69.40.30, Height=3.46mm, Introduction Date=2021-04-29, Lifecycle Status=Production, Manufacturer Part Number=USB4105-GF-A, Number of Contacts=16, Number of Ports=1, Number of Positions=24, Number of Rows=1, Orientation="Right Angle", Pins=16, Pricing="1=0.8, 10=0.676, 25=0.6336, 50=0.6034, 100=0.5745, 250=0.53848, 800=0.49603, 1600=0.47234, 2400=0.45903, 4000=0.44278, 5600=0.43239, 8000=0.42165 (USD)", REACH SVHC=Yes, RoHS=Compliant, Shell Finish=Nickel, Shell Material="Stainless Steel", Stock=151521, Supplier=DigiKey, Supplier 1=DigiKey, Supplier Part Number 1=2073-USB4105-GF-ACT-ND, Terminal Pitch=500µm, USB Standard="USB 2.0"
J101: library part CMP-2000-05162-1, "Male Header, Pitch 2 mm, 1 x 2 Position, Height 6 mm, Tail Length 3.4 mm, -25 to 85 degC, RoHS, Bulk", Manufacturer=JST, Datasheet URL=http://datasheet.octopart.com/B2B-PH-K-S%28LF%29%28SN%29-JST-datasheet-8324864.pdf, Datasheet Version=Nov-08, Manufacturer URL=http://www.jst.com/home2.html, No of Positions=2, Pitch=2mm, Style/Orientation=StraightHeader/Plug, Termination=Crimp, Type=ShroudedHeader
L101 L102: library part CMP-08253-000356-1, "Shielded Multilayer Inductor 2.2uH ±20% 1200mA 143mΩ SMD 0806", Case Code (Imperial)=0806, Case Code (Metric)=2016, Current Rating=1.2A, DC Resistance (DCR)=143mR, Max Operating Temperature=125°C, Min Operating Temperature=-40°C, Package Quantity=3000, Test Frequency=2MHz, Tolerance=20%, Case/Package=0806, Core Material=Ferrite, Height - Seated (Max)=0.039inch, Inductance=2.2uH, Length=0.079inch, Mount="Surface Mount", Packaging="Tape and Reel", RoHS Compliant=Yes, Shielding=Shielded, Width=0.063inch
L201: library part L0201-2n2, "High frequency chip inductor, ±5%", Author=rsk, Component Class=Inductors, Footprint Doc=0201, Pad Count=2
L202 L203: library part L0603-10µ, "Chip Inductor, IDC,min = 50 mA, ±20%", Author=rsk, Component Class=Inductors, Footprint Doc=0603, Pad Count=2
MD601: library part CMP-207130-000027-1, "M10 GNSS LGA PATCH ANTENNA MOD"
PPG401: "High-Sensitivity Pulse Oximeter and Heart-Rate Sensor for Wearable Health", Manufacturer="Analog Devices", Manufacturer Lifecycle Status=PRODUCTION, Max Operating Temperature=85°C, Min Operating Temperature=-40°C, Category=Sensors, ComponentLink1Description=https://datasheet.octopart.com:443/MAX30102EFD%2BT-Analog-Devices-datasheet-138896825.pdf?src-supplier=Newark, ComponentLink1URL=https://datasheet.octopart.com:443/MAX30102EFD%2BT-Analog-Devices-datasheet-138896825.pdf?src-supplier=Newark, ComponentLink2Description=https://octopart.com:443/opatz8j6/c1?t=lNLdbXEB-8Tfy8yyi4Ep1fg7LQBHMOUji7viRAxOBTnstiUziOP12QkdXpxsJz2gTCdMLFd-o1sQhiq2QGCXJAw1OXoBq43W6EvqANHznVSVXZIvjcOQ14Y9w58vDVvxUyf5yLP6ooKDBR_TMbQokFu0a_69z_GhI_gBgFQO_qOVaRFVU7xfxZqeajADuRKWlhE-FhNjkerkGbayOHC05gfclkqna1nR66NbwE0W05Kd5w-3rkyZdBWpea1K5kTkzC5cc6dy1LvAz2CYcaBGdRuMedz6_0DBNqLseYE7_4nUa2FvBnotLbJr&src-supplier=Analog+Devices, ComponentLink2URL=https://octopart.com:443/opatz8j6/c1?t=lNLdbXEB-8Tfy8yyi4Ep1fg7LQBHMOUji7viRAxOBTnstiUziOP12QkdXpxsJz2gTCdMLFd-o1sQhiq2QGCXJAw1OXoBq43W6EvqANHznVSVXZIvjcOQ14Y9w58vDVvxUyf5yLP6ooKDBR_TMbQokFu0a_69z_GhI_gBgFQO_qOVaRFVU7xfxZqeajADuRKWlhE-FhNjkerkGbayOHC05gfclkqna1nR66NbwE0W05Kd5w-3rkyZdBWpea1K5kTkzC5cc6dy1LvAz2CYcaBGdRuMedz6_0DBNqLseYE7_4nUa2FvBnotLbJr&src-supplier=Analog+Devices, ComponentLink3Description=https://sigma.octopart.com:443/140085706/technical_drawing/Maxim-Integrated-MAX30102EFD%2BT.pdf?src-supplier=ShanghaiCT, ComponentLink3URL=https://sigma.octopart.com:443/140085706/technical_drawing/Maxim-Integrated-MAX30102EFD%2BT.pdf?src-supplier=ShanghaiCT, ComponentLink4Description=https://datasheet.octopart.com:443/MAX30102EFD%2BT-Maxim-Integrated-datasheet-65703272.pdf?src-supplier=Future+Electronics, ComponentLink4URL=https://datasheet.octopart.com:443/MAX30102EFD%2BT-Maxim-Integrated-datasheet-65703272.pdf?src-supplier=Future+Electronics, ComponentLink5Description=http://sigma.octopart.com:80/conflict_mineral_statement/Analog-Devices-company-33.pdf?src-supplier=Compliance+Statements, ComponentLink5URL=http://sigma.octopart.com:80/conflict_mineral_statement/Analog-Devices-company-33.pdf?src-supplier=Compliance+Statements, ComponentLink6Description=http://sigma.octopart.com:80/reach_statement/Maxim-Integrated-company-67.pdf?src-supplier=Compliance+Statements, ComponentLink6URL=http://sigma.octopart.com:80/reach_statement/Maxim-Integrated-company-67.pdf?src-supplier=Compliance+Statements, ComponentLink7Description=http://sigma.octopart.com:80/rohs_statement/Maxim-Integrated-company-66.pdf?src-supplier=Compliance+Statements, ComponentLink7URL=http://sigma.octopart.com:80/rohs_statement/Maxim-Integrated-company-66.pdf?src-supplier=Compliance+Statements, ComponentLink8Description=http://sigma.octopart.com:80/conflict_mineral_statement/Maxim-Integrated-company-65.pdf?src-supplier=Compliance+Statements, ComponentLink8URL=http://sigma.octopart.com:80/conflict_mineral_statement/Maxim-Integrated-company-65.pdf?src-supplier=Compliance+Statements, ComponentLink9Description=https://octopart.com:443/opatz8j6/c1?t=GsCt6aUpOQZgLTAwy0RBe6VsdHe-YM9CHSfZbpG2BIHTLL6za4yMq7SeTLKgtsalxQzcPM4gwltrYJQATWSkjq-ZOauWDS99dmEtuyDrm5CMyiSwn4YVYgrc5-8zEVaZQwsVrbhWgf4IihAwKWxSwuC3IuAlEmd_BDG_ezWI42kw2SprHEToFG0VN0FjC_hwMAdTZF1mnz1-AXLMt1O2U-REnbHhwnY4I5_cRgWL3NsbmJbHfrYGaigF3NkWMAVHGLmDUv6I_DszeMkKCRV1y439GhWoj1xfZe8LgWUXVUrh8MonsIarQGZ5&src-supplier=Compliance+Statements, ComponentLink9URL=https://octopart.com:443/opatz8j6/c1?t=GsCt6aUpOQZgLTAwy0RBe6VsdHe-YM9CHSfZbpG2BIHTLL6za4yMq7SeTLKgtsalxQzcPM4gwltrYJQATWSkjq-ZOauWDS99dmEtuyDrm5CMyiSwn4YVYgrc5-8zEVaZQwsVrbhWgf4IihAwKWxSwuC3IuAlEmd_BDG_ezWI42kw2SprHEToFG0VN0FjC_hwMAdTZF1mnz1-AXLMt1O2U-REnbHhwnY4I5_cRgWL3NsbmJbHfrYGaigF3NkWMAVHGLmDUv6I_DszeMkKCRV1y439GhWoj1xfZe8LgWUXVUrh8MonsIarQGZ5&src-supplier=Compliance+Statements, Lifecycle Status=Production, Manufacturer Part Number=MAX30102EFD+T, Pins=14, Pricing="1=14.08, 10=11.09, 25=10.35, 50=10.07, 100=9.81 (USD)", RoHS=Compliant, Stock=3293, Supplier=Newark, Supplier Part Number=MAX30102EFD+T
R101 R102 R103 R104 R201 R401 R601 R602 R701: library part R0201, "Resistor, ±1%, 0.05W", Author=rsk, Component Class=Resistors, Footprint Doc=0201, Pad Count=2
U101: library part nPM1300_QEAA, "Li-Ion/Li-Polymer USB-C battery charger with high efficiency buck regulators, LDOs or load switches, LED drivers, TWI and VBUSOUT", Manufacturer="Nordic Semiconductor", Part number IPS=N.A., Part number NEMS=102000291, Artikkelnr Noca=N.A., Author=eisk, Component Class=Nordic_Devices, Component Status=Active, ComponentLink1Description=Datasheet, ComponentLink1URL=N.A., ComponentLink2Description="Supplier link", ComponentLink2URL=N.A., Footprint Doc=QFN-32, HelpURL=N.A., LatestRevisionDate=2023-05-25, Manufacturer Part Number=nPM1300-QEAA, Note=N.A., Pad Count=33, Part Number=nPM1300-QEAA, Part number Norautron=N.A., PartId=102000291, Published=2022-02-17, Supplier 1="Nordic Semiconductor", Supplier 2=N.A., Supplier Part Number 1=nPM1300-QEAA, Supplier Part Number 2=N.A.
U201: "Multi-protocol Bluetooth Low Energy, IEEE 802.15.4, ANT and 2.4GHz proprietary system-on-chip", Author=rsk, Component Class=nRF_Devices, Footprint Doc=AQFN-98, Pad Count=98
X201: library part XTAL_SMD2016_32MHz_8pF_General, "XTAL SMD 2016, 32MHz, Cl=8pF, Total Tol: ±30ppm", Author=rsk, Component Class=Oscillators, Footprint Doc=XTAL_2016, Pad Count=4
X202: library part XTAL_SMD2012_32.768kHz_9pF_General, "XTAL SMD 2012, 32.768kHz, Cl=9pF, Total Tol: ±50ppm", Author=rsk, Component Class=Oscillators, Footprint Doc=XTAL_2012, Pad Count=2

## Free pads (board coordinates)
  rect 0.762x0.762 smd mask+0.076: 0(7.9,1)
  round 0.3 on Mech16: 1(-2.8,-0.8) 1(-2.8,-2.8) 1(-2.8,-2.4) 1(-2.8,-2) 1(-2.8,-1.6) 1(-2.8,-1.2) 1(-2.8,-0.4) 1(-2.8,0.4) 1(-2.8,0.8) 1(-2.4,-2.8) 1(-2,-2.8) 1(-1.6,-2.8) 1(-1.2,-2.8) 1(-0.8,-2.8) 1(-0.4,-2.8) 1(-0.4,2.8) 1(0,-2.8) 1(0,2.8) 1(0.2,3.2) 1(0.4,2.8) 1(0.4,-2.8) 1(0.8,-2.8) 1(0.8,2.8) 1(1.2,-2.8) 1(1.2,2.8) 1(1.6,-2.8) 1(1.6,2.8) 1(2,-2.8) 1(2.4,-2.8) 1(2.8,-2.8)

## Via types
v1: diameter 0.5, hole 0.25, Top Layer to Bottom Layer, tented both sides, 65 vias
v2: diameter 0.3, hole 0.1, Top Layer to Mid Layer 1, tented top, 30 vias
v3: diameter 0.61, hole 0.305, Top Layer to Bottom Layer, 16 vias
v4: diameter 0.5, hole 0.25, Top Layer to Bottom Layer, 3 vias

## Nets (pads, with @x,y where several pads share a name; then routed paths per layer and width w, separated by ;. In a path a pad name is that pad's centre, name@x,y a point inside that pad or via, vN(x,y) a via of type N, cw(c..) or ccw(c..) an arc to the next point about the centre after c; other vN are vias at no path point)
"1.8 V": B701.2 C103.1 C108.1 C401.2 C402.2 C501.2 C502.2 IMU501.5 IMU501.8 IMU501.12 L101.1 PPG401.11 R103.2 R104.2 R401.2 U101.1 U101.12 | length 0
"3.0 V": C109.1 C202.1 C208.1 C209.1 C210.1 C211.1 C212.1 C213.1 C214.1 C215.1 C216.2 C219.1 C601.1 C602.2 C604.2 L102.1 MD601.2 MD601.17 R601.1 R602.1 R701.1 U101.32 U201.A19 U201.AC1 U201.AG1 U201.AJ31 U201.AL3 U201.AL7 U201.AL11 U201.AL17 U201.AL25 U201.B8 U201.B28 U201.C1 U201.E1 U201.E31 U201.L1 U201.N31 U201.U1 | length 86.3
  Top Layer w0.15: v1@-5.79,-3.975 C209.1 -5.467,-3.475 -5.243,-3.25 -5.243,-2.168 -3.275,-0.2 U201.U1 ; v1(-5.225,2.75) -5.2,2.775 -4.74,2.775 C208.1 ; v1(-4.818,-4.64) -4.818,-4.393 -4.388,-3.963 -4.388,-2.546 -3.242,-1.4 U201.AC1 ; C208.1@-4.7,2.775 -4.475,2.775 -4.3,2.6 U201.C1 ; C210.1 -4.026,-4.382 -3.863,-4.218 -3.863,-2.809 -3.253,-2.2 U201.AG1 ; C210.1@-3.95,-4.59 -3.652,-4.59 v1(-3.602,-4.64) v1@-3.475,-4.64 ; v1(-2.702,-4.64) -2.702,-3.302 U201.AL3 ; v1(-1.8,-4.64) U201.AL7 ; U201.AL11 -0.95,-3.25 -0.95,-3.514 ; C211.1@-0.948,-4.64 v1@-0.6,-4.64 ; C211.1 -0.948,-3.514 ; U201.AL17@0.2,-3.242 0.6,-3.642 v1(0.6,-4.64) ; U201.AL25 1.8,-3.346 2.05,-3.596 C212.1 2.1,-4.64 v1(2.575,-4.64) ; U201.B28 2.4,2.875 2.537,3.012 2.537,3.457 2.931,3.85 3.749,3.85 4.374,4.475 C215.1 4.675,4.585 v1@4.675,4.975 ; U201.AJ31 4.225,-2.6 v1(4.75,-3.125) ; U201.N31 3.277,0.6 4.002,-0.125 C213.1 4.515,-0.365 v1(4.725,-0.575) ; U201.E31 3.242,2.2 3.967,2.925 4.64,2.925 C214.1
  Top Layer w0.158: -4.3,2.6 -3.9,2.2 U201.E1
  Top Layer w0.187: C216.2@-2.75,5.38 -2.75,5.208 -1.557,4.015 -1.557,2.843 U201.B8
  Top Layer w0.2: -7.4,-0.75 C219.1@-6,-0.75 ; v1(-6.775,-1.4) -6.55,-1.4 -6.15,-1 C219.1 -5.277,-1 -3.277,1 U201.L1
  Top Layer w0.203: C214.1 v1(4.65,3.4)
  Top Layer w0.225: U201.A19 0.6,4.295 1.2,4.895 C202.1@1.2,5.35 ; v1(0.938,7.525) 0.787,7.375 0.787,5.838 C202.1@1.275,5.35
  Top Layer w0.3: v4(-17.725,5.674) -17.475,5.424 U101.32 ; v1(-3.525,5.3) C216.2@-2.9,5.3
  Bottom Layer w0.3: v1(4.65,3.4) 4.65,5.05 2.125,7.575 -1.325,7.575 -3.6,5.3 -3.6,4.375 v1(-5.225,2.75) -6.775,1.2 v1(-6.775,-1.4) -5.9,-2.275 -5.9,-4 -5.26,-4.64 v1(-4.818,-4.64) v1(-3.602,-4.64) v1(-2.702,-4.64) v1(-1.8,-4.64) v1(-0.55,-4.64) v1(0.6,-4.64) v1(2.575,-4.64) 3.235,-4.64 v1(4.75,-3.125) 4.75,-0.6 v1(4.725,-0.575)
  other v1: -5.89,-3.975 4.7,4.975
ANT: C201.2 L201.2 U201.L31 | length 1.6
  Top Layer w0.225: U201.L31 L201.2
CC1: J001.A5 U101.23
CC2: J001.B5 U101.24
D_N: D001.4 U201.B4 | length 6.8
  Top Layer w0.15: -2.525,3.425 -2.525,2.975 -2.4,2.85 U201.B4
  Top Layer w0.165: -8.216,4.158 -3.027,4.158 -2.525,3.656 -2.525,3.425
D_P: D001.6 U201.B2 | length 6.2
  Top Layer w0.15: U201.B2 -2.8,3.36
  Top Layer w0.165: -8.216,3.8 -3.175,3.8 -2.815,3.44 -2.815,3.365
GND: B701.1 C001.2 C002.2 C003.2 C101.2 C102.2 C103.2 C106.2 C107.2 C110.2 C111.2 C112.2 C113.2 C201.1 C202.2 C203.1 C204.2 C205.1 C206.2 C207.1 C208.2 C209.2 C210.2 C211.2 C212.2 C213.2 C214.2 C215.2 C216.1 C217.2 C218.2 C219.2 C221.1 C401.1 C402.1 C501.1 C502.1 C601.2 C602.1 C603.1 C604.1 C701.1 D001.2 IMU501.1 IMU501.6 IMU501.7 J001.A1-B12 J001.B1-A12 J101.2 MD601.1 MD601.4 MD601.5 MD601.6 MD601.10 MD601.11 MD601.15 MD601.16 MD601.20 PPG401.12 R101.2 R102.2 U101.18 U101.33 U201.104 U201.A25 U201.B12 U201.B26 U201.G1 U201.H2 U201.J31 X201.2 X201.4 | length 27.1
  Top Layer w0.165: U201.A25 U201.B26
  Top Layer w0.187: -6.275,1.9 -5.657,1.281 -4.46,1.281 -3.941,1.8 U201.G1 U201.H2 U201.104@-2.1,1.6 ; -0.931,3.07 U201.B12 ; -0.931,3.074 v1@-0.931,4.4
  Top Layer w0.2: U201.A25 1.8,3.65 1.875,3.725 1.875,3.727 2.304,4.156 C206.2
  Top Layer w0.225: U201.104@-1.2,1.4 U201.104 U201.104@0.495,0 ; U201.104@-0.8,1.4 U201.B12 ; C202.2@1.275,6.35 1.275,6.925 v1@1.35,7 ; U201.104@1.6,1.4 3.815,1.4 4,1.585 C201.1 ; U201.104@2,1.4 U201.B26 ; v1(4.175,2.475) v1@4.285,2.365 ; C204.2 5.2,3.325 v1(5.275,3.4) ; v1@5.65,4.475 5.664,4.489 v1(5.664,4.572)
  Top Layer w0.25: v1@-7.1,-3.888 -7.1,-3.775 -6.8,-3.475 C209.2 -6.39,-3.505 -6.39,-3.79 -6.55,-3.95 ; v1(-5.5,3.325) -5.44,3.385 C208.2 ; C207.1@-1.3,5.025 -0.875,4.6 v1@-0.875,4.45 ; C206.2@2.3,4.3 v1@2.3,5.05 ; v1@4.285,2.365 C214.2 ; C215.2 v1@5.65,4.475
  Top Layer w0.254: v1(-7.15,1.975) -6.35,1.975 -6.275,1.9 ; C210.2 -4.026,-5.499 v1@-3.85,-5.675 ; v1(-1.525,5.95) -1.525,5.33 C207.1 ; v1(-0.948,-5.675) C211.2 ; v1(2.05,-5.675) C212.2 ; v1@6.528,2.388 6.528,3.107 X201.4 ; v1(7.696,5.334) 7.696,4.583 X201.2
  other v1: -7.925,-5.925 7.925,-5.925 4.925,-5.75 -3.926,-5.675 -5.156,-5.664 4.4,-4.625 5.475,-4.275 -7.925,-3.85 -7,-3.837 5.512,-3.073 7.925,-2.05 6.725,-0.9 5.625,0.126 7.025,0.126 7.911,0.126 -5.1,0.375 4.125,0.5 6.731,1.778 7.95,1.778 5.461,1.803 -7.925,1.975 6.528,2.413 -7.925,3.2 -0.85,4.475 2.325,5.05 -7.925,5.175 -6.325,5.175 5.375,5.175 6.553,6.071 -6.35,6.725 1.35,7.025 -2.85,7.175 -5.425,7.6 -4.3,7.6 -7.925,7.925 3.875,7.925 5.65,7.925 7.925,7.925
  other v3: -1.8,-1.8 -0.467,-1.8 0.867,-1.8 2.2,-1.8 -1.8,-0.6 -0.467,-0.6 0.867,-0.6 2.2,-0.6 -1.8,0.6 -0.467,0.6 0.867,0.6 2.2,0.6 -1.8,1.8 -0.467,1.8 0.867,1.8 2.2,1.8
GNNS-INT: MD601.19 U201.AK16 | length 4
  Mid Layer 1 w0.125: v2(0,-2.8) 0.062,-2.862 0.062,-2.94 1.1,-3.977 1.1,-4.818 0.85,-5.068 0.85,-6.237
GNNS-RST: MD601.18 U201.AL13 | length 3.2
  Top Layer w0.125: U201.AL13 -0.6,-3.65 -0.1,-4.15 -0.1,-6.225
GNNS-TMP: MD601.7 U201.AL15 | length 3.2
  Top Layer w0.125: U201.AL15 -0.2,-3.65 0.15,-4 0.15,-6.225
GPIO0: U101.7
GPIO1: U101.8
GPIO2: U101.9
GPIO3: U101.10
GPIO4: U101.11 U201.R31 | length 9.1
  Top Layer w0.125: U201.R31@3.213,0.212 4.438,-1.013 6.055,-1.013 7.175,-2.132 7.375,-2.332 7.375,-6.225
IMU-INT: IMU501.9 U201.AB2 | length 5.9
  Mid Layer 1 w0.125: -8.225,-2.338 -4.015,-2.338 -2.877,-1.2 v2(-2.8,-1.2)
IN-D_N: D001.3 J001.A7 J001.B7
IN-D_P: D001.1 J001.A6 J001.B6
NetB701_7: B701.7 B701.8 C701.2 R701.2
NetC001_1: C001.1 C002.1 C003.1 C101.1 D001.5 J001.A4-B9 J001.B4-A9 U101.21
NetC102_1: C102.1 J101.1 U101.19
NetC112_1: C112.1 C113.1 U101.31 | length 5.1
  Top Layer w0.3: U101.31 -16.975,5.975 -17.425,6.425 -17.9,6.425 -18.126,6.651 -18.126,7.299 C113.1
NetC203_2: C203.2 C204.1 L202.1 U201.A27 U201.G31 | length 10.3
  Top Layer w0.2: U201.A27 2.2,3.593 2.907,4.3 3.625,4.3 3.975,4.65 C203.2@3.975,5.05 ; U201.G31 3.5,1.8 3.7,2 4.875,2 ; C203.2@4,5.05 C203.2@4.013,5.062 ; 4.9,2 5.315,2.415 5.54,2.415
  Top Layer w0.25: L202.1 3.65,6.05 3.9,5.8 3.9,5.175 4.013,5.062 C203.2
  Bottom Layer w0.2: v1(2.95,4.3) 4.286,2.964 4.414,2.964 4.453,2.925 5.375,2.925 v1(5.75,2.55)
NetC205_2: C205.2 L203.1 U201.A15 | length 4.3
  Top Layer w0.225: L203.1@-0.475,6.95 0.127,6.348 C205.2@0.127,6.078 ; U201.A15 -0.2,3.4 0.25,3.85 C205.2 C205.2@0.25,5.975
  Top Layer w0.25: L203.1@-0.475,6.95 L203.1 ; C205.2@0.127,6.078 C205.2
NetC206_1: C206.1 U201.A23 | length 1.2
  Top Layer w0.2: U201.A23 1.4,3.712 1.734,4.046 C206.1
NetC207_2: C207.2 U201.A13 | length 2
  Top Layer w0.225: U201.A13 -0.6,3.55 -0.3,3.85 C207.2
NetC217_1: C217.1 R201.2 U201.A5 | length 5.6
  Top Layer w0.15: U201.A5 U201.A5@-2.175,3.225
  Top Layer w0.18: U201.A5@-2.18,3.225 -2.18,3.315
  Top Layer w0.2: C217.1 -5.425,4.775 -5.315,4.665 R201.2 ; C217.1@-5.275,5.23 -5.125,5.38 -5.125,5.1 -4.491,4.466 -2.899,4.466 -2.2,3.766 U201.A5
NetC218_1: C218.1 U201.B6 | length 4.2
  Top Layer w0.187: C218.1@-4.3,5.375 -3.709,4.784 -2.767,4.784 -1.869,3.886 -1.869,3.074 ; C218.1@-4,5.375 C218.1@-4,5.38 ; U201.B6 -1.869,3.07
NetL202_2: L202.2 U201.A21 | length 3.4
  Top Layer w0.225: U201.A21 1,4.2 1.825,5.025 1.825,5.6 L202.2
NetL203_2: L203.2 U201.B10 | length 4.8
  Top Layer w0.187: L203.2@-1.7,7.025 -2.15,6.575 -2.15,5.049 -1.243,4.142 -1.243,2.843 U201.B10
P0.00/XL1: U201.N1 X202.1 | length 5.6
  Top Layer w0.125: X202.1@-7.4,-2.556 X202.1@-7.347,-2.503 ; X202.1@-7.4,-2.45 -7.4,-2.262 -6.975,-1.837 -6.581,-1.837 -6.306,-1.562 -5.387,-1.562 -3.224,0.6 U201.N1
P0.01/XL2: U201.R1 X202.2 | length 3.9
  Top Layer w0.125: X202.2 -5.825,-2.187 -5.489,-1.852 -5.298,-1.852 -3.246,0.2 U201.R1
P0.02/NFC1: U201.W1 | length 7.4
  Top Layer w0.165: -8.212,-4.432 -5.682,-4.432 -4.96,-3.71 -4.96,-2.297 -3.263,-0.6 U201.W1
P0.03/NFC2: U201.AA1 | length 7.4
  Top Layer w0.165: -8.212,-4.722 -5.547,-4.722 -4.67,-3.845 -4.67,-2.417 -3.253,-1 U201.AA1
P0.04/AIN0: U201.V2 | length 6
  Mid Layer 1 w0.125: -8.225,-1.837 -4.315,-1.837 -2.877,-0.4 v2(-2.8,-0.4)
P0.05/AIN1: U201.Y2 | length 6
  Mid Layer 1 w0.125: -8.225,-2.088 -4.165,-2.088 -2.877,-0.8 v2(-2.8,-0.8)
P0.07/AIN3: U201.AD2 | length 5.8
  Mid Layer 1 w0.125: -8.225,-2.588 -3.911,-2.588 -2.924,-1.6 v2(-2.8,-1.6)
P0.08/TRACEDATA3: U201.AH2 | length 5.7
  Mid Layer 1 w0.125: -8.225,-3.088 -3.588,-3.088 -2.9,-2.4 v2(-2.8,-2.4)
P0.09/TRACEDATA2: U201.AJ1 | length 4
  Top Layer w0.125: U201.AJ1 -3.282,-2.6 -3.6,-2.918 -3.6,-3.85 -3.15,-4.3 -3.15,-6.225
P0.10/TRACEDATA1: U201.AK2 | length 5.6
  Mid Layer 1 w0.125: -8.225,-3.338 -3.338,-3.338 v2(-2.8,-2.8)
P0.11/TRACEDATA0: U201.AK4 | length 3.7
  Mid Layer 1 w0.125: -3.15,-6.225 -3.15,-3.673 -2.4,-2.924 v2(-2.4,-2.8)
P0.12/TRACECLK: U201.AK6 | length 3.7
  Mid Layer 1 w0.125: -2.667,-6.225 -2.667,-5.232 -2.261,-4.826 -2.261,-3.138 -2,-2.877 v2(-2,-2.8)
P0.13/QSPI0: U201.AL5 | length 3.1
  Top Layer w0.125: -2.2,-6.225 -2.2,-4.859 -2.238,-4.821 -2.238,-4.459 -2.2,-4.421 U201.AL5
P0.14/QSPI1: U201.AK8 | length 3.7
  Mid Layer 1 w0.125: -1.65,-6.237 -1.65,-5.404 -1.3,-5.054 -1.3,-3.177 -1.538,-2.94 -1.538,-2.862 v2(-1.6,-2.8)
P0.15/QSPI2: U201.AK10 | length 3.6
  Mid Layer 1 w0.125: -1.4,-6.237 -1.4,-5.508 -1.05,-5.158 -1.05,-3.027 -1.138,-2.94 -1.138,-2.862 v2(-1.2,-2.8)
P0.16/QSPI3: U201.AL9 | length 3.1
  Top Layer w0.125: -1.4,-6.225 -1.4,-4.859 -1.362,-4.821 -1.362,-4.459 -1.4,-4.421 U201.AL9
P0.17/QSPI_CLK: U201.AK12 | length 3.7
  Mid Layer 1 w0.125: v2(-0.8,-2.8) -0.738,-2.862 -0.738,-2.94 -0.1,-3.577 -0.1,-6.237
P0.18/QSPI_CS: U201.AK14 | length 3.7
  Mid Layer 1 w0.125: v2(-0.4,-2.8) -0.338,-2.862 -0.338,-2.94 0.15,-3.427 0.15,-6.237
P0.22: PPG401.13 R401.1 U201.AK18 | length 4
  Mid Layer 1 w0.125: v2@0.363,-2.837 v2(0.4,-2.8) 0.4,-2.877 1.35,-3.827 1.35,-4.921 1.1,-5.171 1.1,-6.237
P0.23: U201.AK20 | length 3.9
  Mid Layer 1 w0.125: v2(0.8,-2.8) 0.8,-2.877 1.6,-3.677 1.6,-5.025 1.35,-5.275 1.35,-6.225
P0.24: U201.AL27 | length 3.4
  Top Layer w0.125: U201.AL27@2.2,-3.224 3.025,-4.049 3.025,-6.225
  Top Layer w0.15: U201.AL27@2.2,-3.242 2.2,-3.224 U201.AL27
P0.25/AIN4: U201.AK28 | length 3.9
  Mid Layer 1 w0.125: v2(2.4,-2.8) 2.4,-2.924 3.55,-4.074 3.55,-6.234
P0.26/AIN5: U201.AL29 | length 3.3
  Top Layer w0.125: U201.AL29@2.6,-3.224 2.653,-3.224 3.3,-3.871 3.3,-6.225
P0.27/AIN6: U201.AK30 | length 3.9
  Mid Layer 1 w0.125: v2(2.8,-2.8) 2.8,-2.97 3.825,-3.995 3.825,-6.234
P0.28/AIN7: U201.AE31 | length 6.7
  Top Layer w0.125: U201.AE31@3.228,-1.772 3.719,-2.263 5.538,-2.263 6.125,-2.85 6.125,-6.225
P0.29: U201.U31 | length 8.6
  Top Layer w0.125: U201.U31@3.212,-0.188 4.287,-1.263 5.952,-1.263 6.825,-2.136 7.125,-2.436 7.125,-6.225
P0.30: U201.B24 | length 5.9
  Mid Layer 1 w0.125: 0.425,8.234 0.425,6.061 1.3,5.186 1.3,3.177 1.6,2.877 v2(1.6,2.8)
P0.31: U201.B22 | length 5.9
  Mid Layer 1 w0.125: 0.175,8.234 0.175,5.957 1.05,5.082 1.05,3.027 1.2,2.877 v2(1.2,2.8)
P1.00: U201.M2 | length 6.1
  Mid Layer 1 w0.125: -8.225,-0.712 -4.39,-0.712 -2.877,0.8 v2(-2.8,0.8)
P1.01: U201.P2 | length 6
  Mid Layer 1 w0.125: -8.225,-0.962 -4.162,-0.962 v2(-2.8,0.4)
P1.02/TWI: B701.4 IMU501.14 PPG401.3 R104.1 U101.13 U201.AE1 | length 4.9
  Top Layer w0.125: -4.369,-6.225 -4.369,-4.344 -4.125,-4.1 -4.125,-2.701 -3.224,-1.8 U201.AE1
P1.03/TWI: B701.3 IMU501.13 PPG401.2 R103.1 U101.14 U201.AF2 | length 5.8
  Mid Layer 1 w0.125: -8.225,-2.838 -3.808,-2.838 -2.97,-2 v2(-2.8,-2)
P1.04: U201.AL19 | length 3.5
  Top Layer w0.125: U201.AL19@0.6,-3.242 0.617,-3.242 0.801,-3.426 ; U201.AL19@0.6,-3.224 0.801,-3.425 ; 1.075,-6.225 1.075,-3.7 0.801,-3.426
  Top Layer w0.15: U201.AL19@0.6,-3.242 U201.AL19
P1.05: U201.AK22 | length 3.8
  Mid Layer 1 w0.125: v2(1.2,-2.8) 1.2,-2.877 1.875,-3.552 1.875,-5.125 1.6,-5.4 1.6,-6.225
P1.06: U201.AL21 | length 3.1
  Top Layer w0.125: U201.AL21@1,-3.224 1,-3.271 1.051,-3.321 ; 1.051,-3.322 1.325,-3.596 1.325,-6.225
P1.07: U201.AK24 | length 4
  Mid Layer 1 w0.125: v2(1.6,-2.8) 1.6,-2.877 3.025,-4.302 3.025,-6.234
P1.08: U201.AL23 | length 3.1
  Top Layer w0.125: U201.AL23 1.4,-3.317 1.6,-3.517 1.6,-6.225
P1.09: U201.AK26 | length 4
  Mid Layer 1 w0.125: v2(2,-2.8) 2,-2.877 3.275,-4.152 3.275,-6.234
P1.11: U201.B20 | length 5.8
  Mid Layer 1 w0.125: -0.075,8.234 -0.075,5.854 0.8,4.979 v2(0.8,2.8)
P1.12: U201.B18 | length 5.8
  Mid Layer 1 w0.125: -0.325,8.234 -0.325,5.75 0.538,4.887 0.538,3.06 0.4,2.923 v2(0.4,2.8)
P1.13: U201.A17 | length 5.4
  Mid Layer 1 w0.125: -0.575,8.234 -0.575,5.582 0.2,4.807 v2(0.2,3.2)
P1.14: U201.B16 | length 5.8
  Mid Layer 1 w0.125: -0.825,8.234 -0.825,5.479 -0.15,4.804 -0.15,3.05 0,2.9 v2(0,2.8)
P1.15: U201.B14 | length 5.7
  Mid Layer 1 w0.125: -1.075,8.234 -1.075,5.375 -0.4,4.7 v2@-0.4,2.825
  other v2: -0.4,2.8
PGND: C403.2 C404.1 PPG401.4
PVSS1: C104.2 C108.2 U101.2
PVSS2: C105.2 C109.2 U101.6
R\E\S\E\T\: U201.AC31 | length 7.2
  Top Layer w0.125: U201.AC31@3.212,-1.388 3.837,-2.013 5.641,-2.013 5.764,-2.136 6.375,-2.746 6.375,-6.225
RF: C221.2 L201.1 pad.0 | length 2.2
  Top Layer w0.762: 5.675,1 pad.0
SCL_HV: B701.6 MD601.12 R602.2
SDA_HV: B701.5 MD601.9 R601.2
SHPHLD: U101.15
SW1: L101.2 U101.3
SW2: L102.2 U101.5
SWDCLK: U201.W31 | length 8.2
  Top Layer w0.125: U201.W31@3.212,-0.588 4.137,-1.513 5.848,-1.513 6.268,-1.932 6.875,-2.539 6.875,-6.225
SWDIO: U201.AA31 | length 7.7
  Top Layer w0.125: U201.AA31@3.212,-0.988 3.987,-1.763 5.745,-1.763 6.625,-2.643 6.625,-6.225
VBUS_OUT: C107.1 R201.1 U101.22 | length 2.3
  Top Layer w0.3: -8.148,4.525 R201.1
VOUTLDO1: C110.1 C111.1 C603.2 MD601.3 U101.29 | length 5
  Top Layer w0.3: U101.29 -15.975,5.575 -14.818,6.732 -14.818,7.075 -14.593,7.3 C111.1
VSET1: R101.1 U101.17
VSET2: R102.1 U101.16